# Altium PCB pmu.PcbDoc
Units mil, origin at the board's own origin, x right, y up, seen from the top; angles counter-clockwise.
Board outline 1870 x 900 mil, 2 copper layers (Top Layer, Bottom Layer); 15 components, 9 nets, 34 pads, 0 vias.
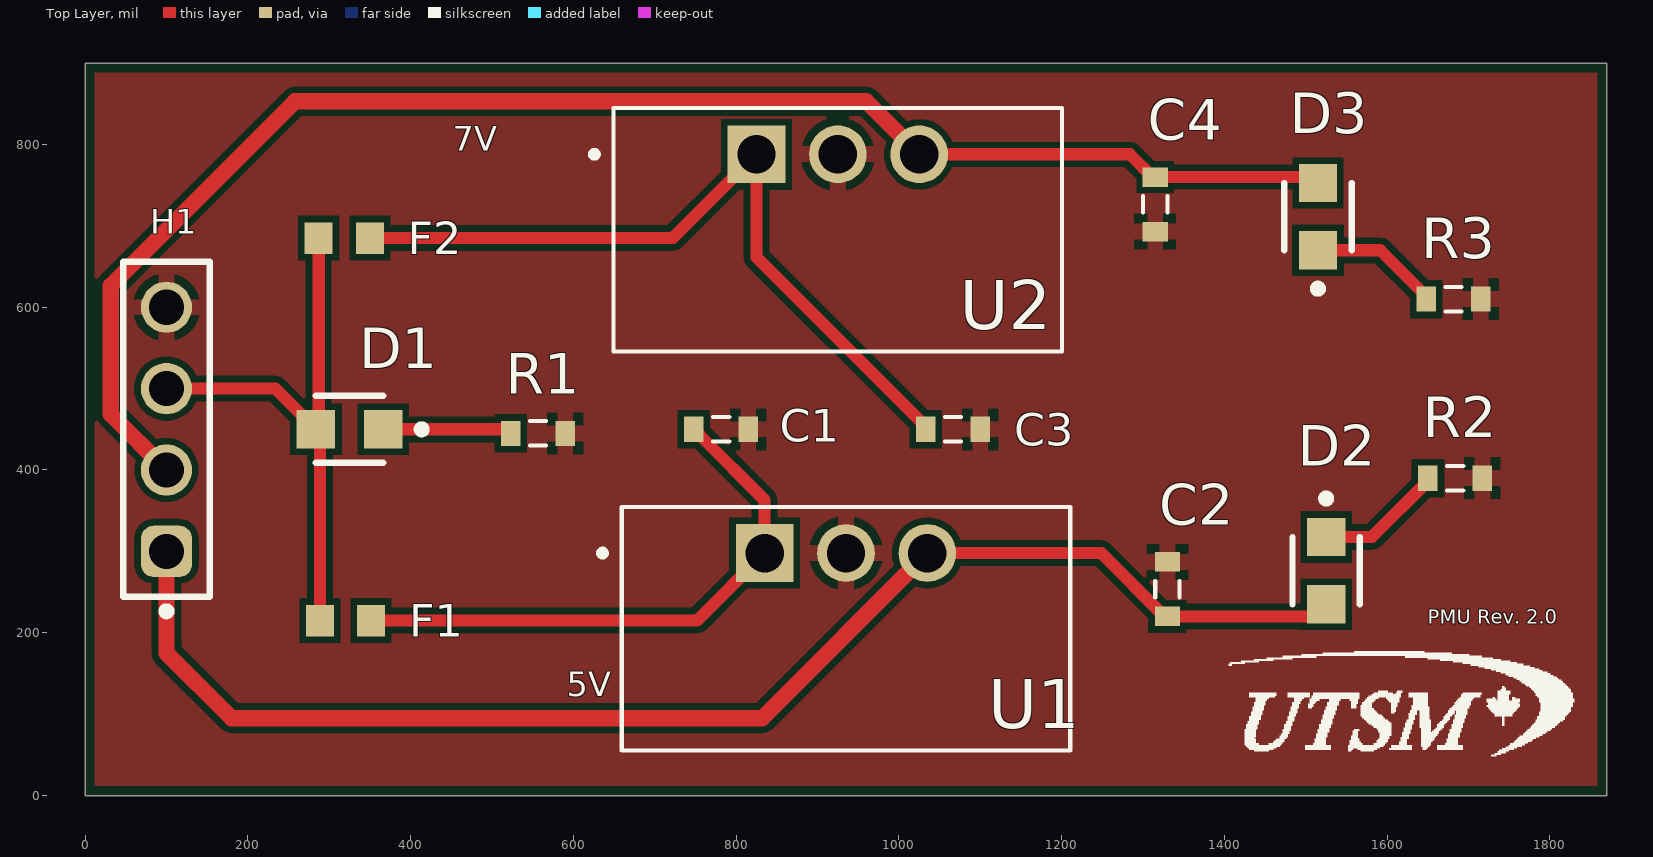
[diagram p0: Top Layer view]
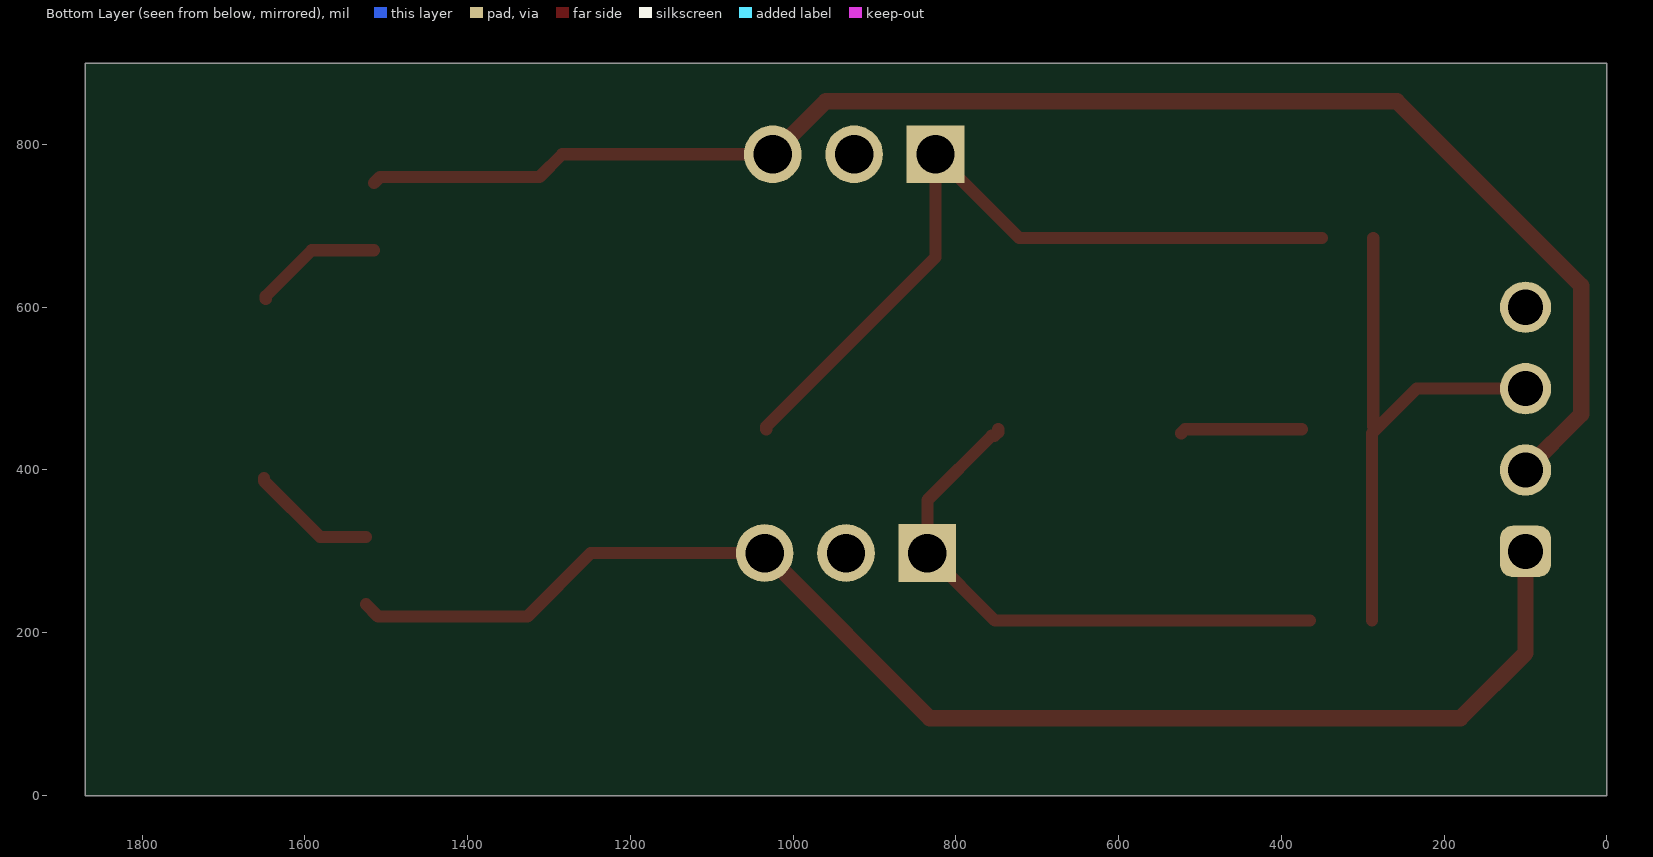
[diagram p1: Bottom Layer view, seen from below]
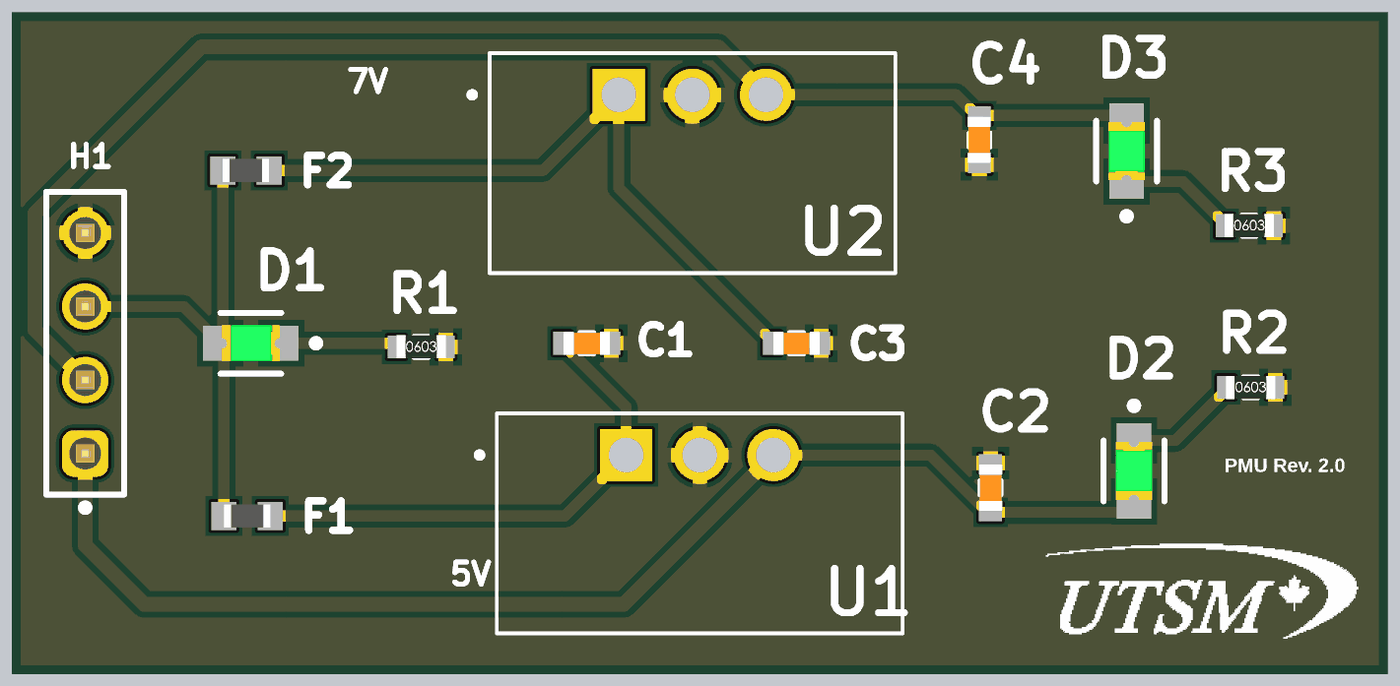
[diagram p2: 3D render of the assembled board from above, using the file's embedded part models]

## Layer stack, top to bottom
Top Solder: solder mask 0.4, Solder Resist, Dk 3.5
Top Layer: signal copper 1.4
Dielectric 1: dielectric 12.6, FR-4, Dk 4.8
Bottom Layer: signal copper 1.4
Bottom Solder: solder mask 0.4, Solder Resist, Dk 3.5

## Board outline
0,0 1870,0 1870,900 0,900

## Design rules (kind name [scope] priority, off if disabled: settings)
BoardOutlineClearance [All] p1: gap=11.81 ignorepadtopadclearanceinfootprint=FALSE except(15.75: Arc-SplitBarrior Arc-SplitContinuation Track-SplitBarrior Track-SplitContinuation SMDPad-SplitBarrior SMDPad-SplitContinuation THPad-SplitBarrior THPad-SplitContinuation Via-SplitBarrior Via-SplitContinuation Fill-SplitBarrior Fill-SplitContinuation Poly-SplitBarrior Poly-SplitContinuation Region-SplitBarrior Region-SplitContinuation Text-SplitBarrior Text-SplitContinuation)
Clearance "Clearance Different Nets" [All] p1: gap=7.87 ignorepadtopadclearanceinfootprint=FALSE except(3.5: Arc-Arc Arc-Track Arc-SMDPad Track-Track Track-SMDPad; 5: SMDPad-SMDPad SMDPad-Via THPad-Via Via-Via; 10: Arc-Via Arc-Text Track-Via Track-Text SMDPad-Text THPad-Text Via-Text Fill-Text Poly-Text Region-Text Text-Text; 19.68: THPad-THPad Via-Hole)
Clearance "Clearance Same Nets" [All] p2: gap=7.87 ignorepadtopadclearanceinfootprint=FALSE except(3.5: Arc-Arc Arc-Track Arc-SMDPad Track-Track Track-SMDPad SMDPad-SMDPad; 5: SMDPad-Via THPad-Via; 10: Arc-Via Arc-Text Track-Via Track-Text SMDPad-Text THPad-Text Via-Via Via-Text Fill-Text Poly-Text Region-Text Text-Text)
Clearance "Clearance Bottom Layer" [OnLayer('Bottom Layer')] p3: gap=8 ignorepadtopadclearanceinfootprint=TRUE except(10: Arc-Text Track-Text SMDPad-Text THPad-Text Via-Text Fill-Text Poly-Text Region-Text Text-Text)
Clearance "Clearance Top Layer" [OnLayer('Top Layer')] p4: gap=8 ignorepadtopadclearanceinfootprint=TRUE except(10: Arc-Text Track-Text SMDPad-Text THPad-Text Via-Text Fill-Text Poly-Text Region-Text Text-Text)
HoleSize [All] p1: absolutevalues=TRUE maxlimit=248.03 minlimit=7.87 maxpercent=80.000 minpercent=20.000
MinimumAnnularRing [All] p1: minimumring=5.12
MinimumSolderMaskSliver [All] p1: minsoldermaskwidth=3.94
PolygonConnect PolygonConnect_1 [All] p1: thpad.connectstyle=Relief thpad.reliefconductorwidth=20 thpad.reliefentries=4 thpad.polygonreliefangle="90 Angle" thpad.airgapwidth=10 smdpad.connectstyle=Relief smdpad.reliefconductorwidth=20 smdpad.reliefentries=4 smdpad.polygonreliefangle="90 Angle" smdpad.airgapwidth=10 via.connectstyle=Direct via.reliefconductorwidth=20 via.reliefentries=4 via.polygonreliefangle="90 Angle" via.airgapwidth=10
RoutingCorners [All] p1: cornerstyle=Round minsetback=100 maxsetback=100
RoutingVias [All] p1: holewidth=19.68 width=39.37 viastyle="Through Hole" minholewidth=7.87 minwidth=13.78 maxholewidth=39.37 maxwidth=78.74
SilkToSilkClearance [All] p1: silktosilkclearance=3.94
SilkToSolderMaskClearance [IsPad] p1: minsilkscreentomaskgap=3.94 clearancetoexposedcopper=TRUE
SolderMaskExpansion [All] p1: expansion=4 istentingtop=FALSE
Width [All] p1: maxlimit=100 minlimit=3.5 preferedwidth=15
25 further rules are at their usual default settings.

## Classes and differential pairs
component class pmu: C1 C2 C3 C4 D3 F1 F2 H1 R1 R2 U1 U2

## Components (designator, comment, footprint, x,y, rotation, side; value= is the part's Value field where it differs from the comment)
C1 "Cap" 0603c 781.5,450 r180 top value=10uF
C2 "Cap" 0603c 1330,253.5 r270 top value=10uF
C3 "Cap" 0603c 1066.5,450 r180 top value=10uF
C4 "Cap" 0603c 1315,726.5 r90 top value=10uF
D1 "LTST-C171GKT" FP-LTST-C171GKT-MFG 325,450 r180 top
D2 "LTST-C171GKT" FP-LTST-C171GKT-MFG 1525,276.34 r270 top
D3 "LTST-C171GKT" FP-LTST-C171GKT-MFG 1515,711.34 r90 top
F1 "FMC16751WBTP" FUSC1608X64N 320,215 r0 top
F2 "FMC16751WBTP" FUSC1608X64N 318.5,685 r0 top
H1 "61300411121" 61300411121 100,450 r90 top
R1 "" 0603r 556.5,445 r0 top value=500
R2 "" 0603r 1683.5,390 r0 top value=300
R3 "" 0603r 1681.5,610 r0 top value=300
U1 "TSR_2-2450N" CONV_TSR_2-2450N 935,205 r0 top
U2 "TSR_2-2450N" CONV_TSR_2-2450N 925,695 r0 top

## Footprints (in the part's own frame and the unit in brackets; to place one, negate y for a bottom-side part, rotate by r counter-clockwise, add the part's x,y. Pads: shape width x height; smd on the part's side, far side on the other; paste and mask are expansions set on the pad)
0603c [mil]
  rect 24x31 smd: 1(-33.5,0) 2(33.5,0)
  silkscreen extent -10,-15 10,15, body extent -31,-15 31,16, height 31
0603r [mil]
  rect 24x31 smd: 1(-33.5,0) 2(33.5,0)
  silkscreen extent -10,-15 10,15, body extent -33,-16 33,16, height 22
61300411121 [mm] "Pin Header, pitch 2.54 mm, THT, Vertical, single row, 4p"
  rrect50% 1.6x1.6 hole 1.1: 1(-3.81,0)
  round 1.6 hole 1.1: 2(-1.27,0) 3(1.27,0) 4(3.81,0)
  silkscreen extent -5.8,-1.35 5.23,1.35, body extent -5.08,-1.27 5.08,1.27, height 8.57
CONV_TSR_2-2450N [mm]
  rect 1.8x1.8 / inner round 1.8 / far side rect 1.8x1.8 hole 1.2: 1(-2.54,2.36)
  round 1.8 hole 1.2: 2(0,2.36) 3(2.54,2.36)
  silkscreen extent -7.7,-3.8 7,3.8
FP-LTST-C171GKT-MFG [mm]
  rect 1.2x1.2 smd paste+0 mask+0: 1(-1.05,0) 2(1.05,0)
  silkscreen extent -2.38,-1.05 1.05,1.05, body extent -1.75,-0.77 1.75,0.77, height 0.25
FUSC1608X64N [mm]
  rect 0.87x0.98 smd: 1(-0.8,0) 2(0.8,0)
  body extent -0.8,-0.4 0.8,0.4, height 0.64

## Part data
C1 C3: "SMD Capacitor / CL21A106KOQNNNG", LatestRevisionDate=17-Jul-2002, LatestRevisionNote="Re-released for DXP Platform.", PackageDescription="Radial Cap, Thru-Hole; 2 Leads; 0.3 in Pin Spacing", PackageReference=RAD-0.3, Published=8-Jun-2000, Publisher="Altium Limited"
C2 C4: "SMD Capacitor", LatestRevisionDate=17-Jul-2002, LatestRevisionNote="Re-released for DXP Platform.", PackageDescription="Radial Cap, Thru-Hole; 2 Leads; 0.3 in Pin Spacing", PackageReference=RAD-0.3, Published=8-Jun-2000, Publisher="Altium Limited"
D1 D2 D3: library part CMP-22017-000007-1, "LED GREEN CLEAR CHIP SMD", Case Code (Imperial)=0805, Case Code (Metric)=2012, Color=Green, Forward Current=30mA, Forward Voltage=2.1V, Lens Color=Colorless, Max Operating Temperature=85°C, Min Operating Temperature=-55°C, Package Quantity=1, Power Dissipation=100mW, Reverse Voltage=5V, Test Current=10mA, Case/Package=0805, Depth=1.25mm, Dominant Wavelength=569nm, Height=0.8mm, Illumination Color=Green, Lead Free="Lead Free", Length=2mm, Lens Style=Diffused, Lens Transparency=Clear, Luminous Intensity=12mcd, Mount="Surface Mount", Number of Elements=1, Number of LEDs=1, Number of Pins=2, Packaging="Tape and Reel", Power Rating=100mW, Radiation Hardening=No, Viewing Angle=130°, Wavelength=585nm, Width=1.25mm
F1 F2: library part ERB-RE1R00V, "0.8A - FMC16801WHTP / 0.75A - FMC16751WBTP", Package="0603 Panasonic Electronic Components", Availability="In Stock", Check_prices=https://www.snapeda.com/parts/ERB-RE1R00V/Panasonic/view-part/?ref=eda, MF=Panasonic, MP=ERB-RE1R00V, Price=None, Purchase-URL=https://pricing.snapeda.com/search/part/ERB-RE1R00V/?ref=eda, SnapEDA_Link=https://www.snapeda.com/parts/ERB-RE1R00V/Panasonic/view-part/?ref=snap
H1: "WR-PHD Pin Header, THT, Vertical, pitch 2.54mm, 1 Row, 4P", Contact Resistance=20mOhm, Manufacturer="Wurth Elektronik", Operating Temperature Max=105°C, Operating Temperature Min=-40°C, Rated Current=3A, Withstanding Voltage=500V, Working Voltage=250V, Category="Board-to-Board Connectors", ComponentLink1Description="Website Link", ComponentLink1URL=https://www.we-online.com/redexpert/article/61300411121?ad, ComponentLink2Description="Datasheet Link", ComponentLink2URL=https://www.we-online.com/redexpert/spec/61300411121?ad, Gender="Pin Header", Manufacturer Part Number=61300411121, Match Code=WR-PHD, Mount="Through Hole", Number of Pins=4, Number of Rows=1, Orientation=Vertical, Packaging=Bag, Pitch=2.54mm
R1 R2 R3: library part Res3, "SMD Resistor", LatestRevisionDate=29-May-2009, LatestRevisionNote="IPC-7351 Footprint Added.", PackageDescription="Chip Resistor", PackageReference=J1-0603, Published=8-Jun-2000, Publisher="Altium Limited"
U1 U2: Package=None, Availability=Unavailable, MF="{'manufacturer': u'Traco Power'}", MP=TSR_2-2450N, Price=None

## Nets (pads, with @x,y where several pads share a name; then routed paths per layer and width w, separated by ;. In a path a pad name is that pad's centre, name@x,y a point inside that pad or via, vN(x,y) a via of type N, cw(c..) or ccw(c..) an arc to the next point about the centre after c; other vN are vias at no path point)
+5: C2.2 D2.2 H1.1 U1.3 | length 1705.7
  Top Layer w15: U1.3 1248.59,297.91 1326.5,220 C2.2 1510,220 D2.2
  Top Layer w20: H1.1 100,175 180,95 832.09,95 U1.3
+7: C4.2 D3.2 H1.2 U2.3 | length 1873.7
  Top Layer w15: U2.3 1283.59,787.91 1311.5,760 C4.2 1507.68,760 D3.2
  Top Layer w20: H1.2 31.54,468.46 31.54,626.54 258.04,853.04 959.88,853.04 U2.3
GND: C1.1 C2.1 C3.1 C4.1 H1.4 R1.2 R2.2 R3.2 U1.2 U2.2
NetC1_2: C1.2 F1.2 U1.1 | length 694.5
  Top Layer w15: F1.2@365,215 752.09,215 U1.1 835,363 756,442 752.5,442 748,446.5 C1.2
NetC3_2: C3.2 F2.2 U2.1 | length 941.7
  Top Layer w15: F2.2 722.09,685 U2.1 825,661.5 1033,453.5 C3.2
NetD1_1: D1.1 R1.1 | length 150.4
  Top Layer w15: D1.1@375,450 385,450 518.5,450 523,445.5 R1.1
NetD2_1: D2.1 R2.1 | length 157
  Top Layer w15: D2.1 1581.18,317.68 1650,386.5 R2.1
NetD3_1: D3.1 R3.1 | length 159.9
  Top Layer w15: D3.1 1591.5,670 1648,613.5 R3.1
Vin: D1.2 F1.1 F2.1 H1.3 | length 677.8
  Top Layer w15: H1.3 233.66,500 D1.2 ; F2.1 287.01,453.35 D1.2 ; F1.1 288.5,445.16 D1.2

## Polygon pours and split planes (outlines as drawn)
GND on Top Layer "GND_L01_P001" (solid, pour order 1): 0,900 0,0 1870,0 1870,900 1448.99,900 1440,900

## Silkscreen, mask and mechanical layers (free items; w line width, h text height)
Top Overlay:
  drawing of 6 lines, arcs and shapes, not listed
  text "7V" at 452,792 h30
  text "PMU Rev. 2.0" at 1650,205 h30
  text "5V" at 592,122 h30